# Altium PCB PCB1.PcbDoc
Units mil, origin at the board's own origin, x right, y up, seen from the top; angles counter-clockwise.
Board outline 3503.93 x 3503.94 mil, 2 copper layers (Top Layer, Bottom Layer); 48 components, 34 nets, 226 pads, 50 vias.
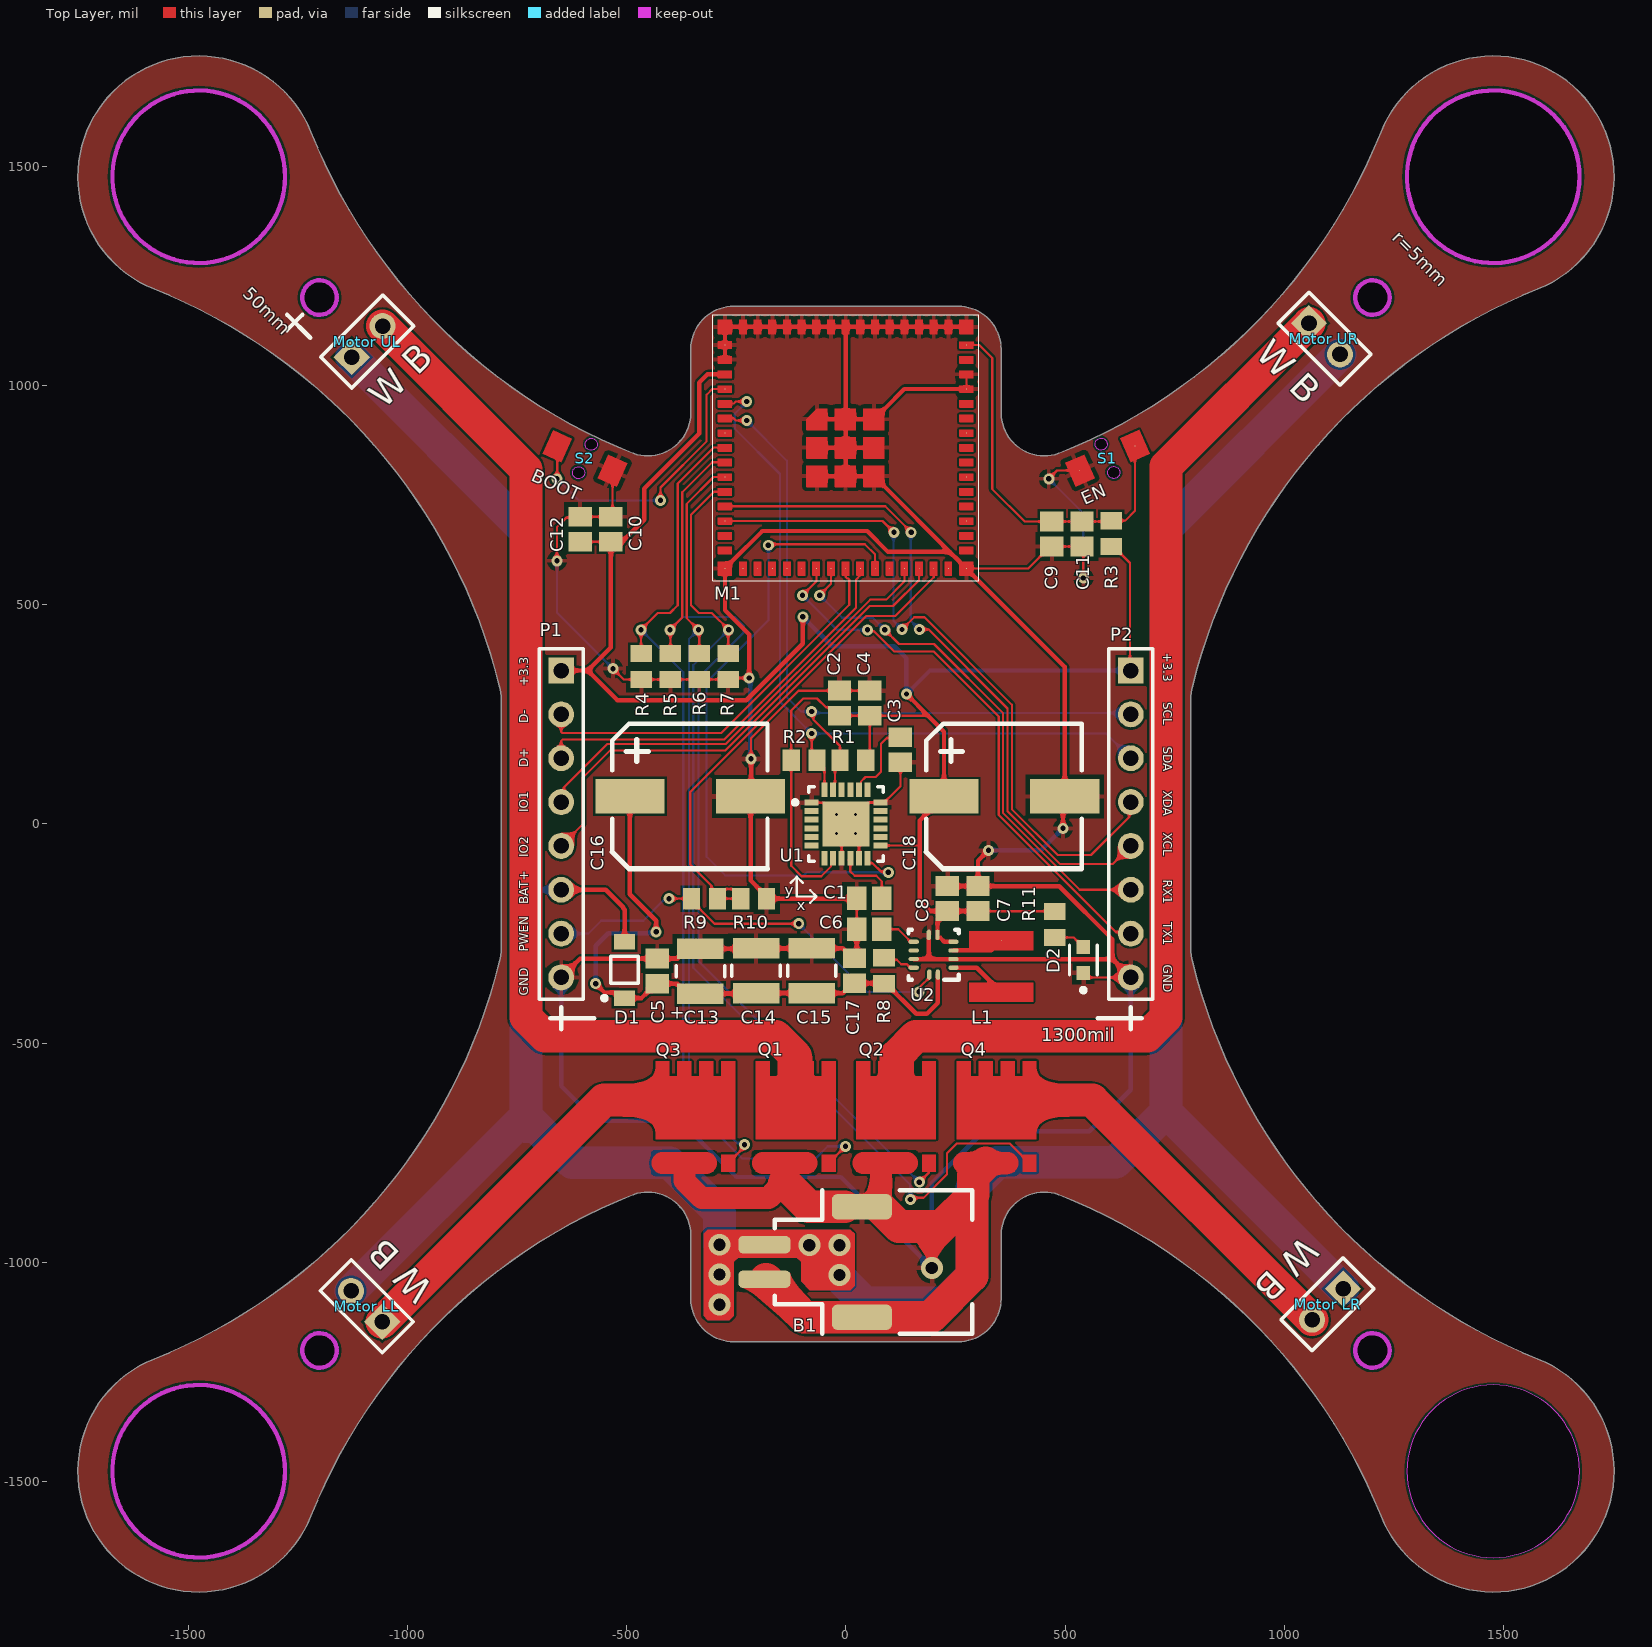
[diagram p0: Top Layer view]
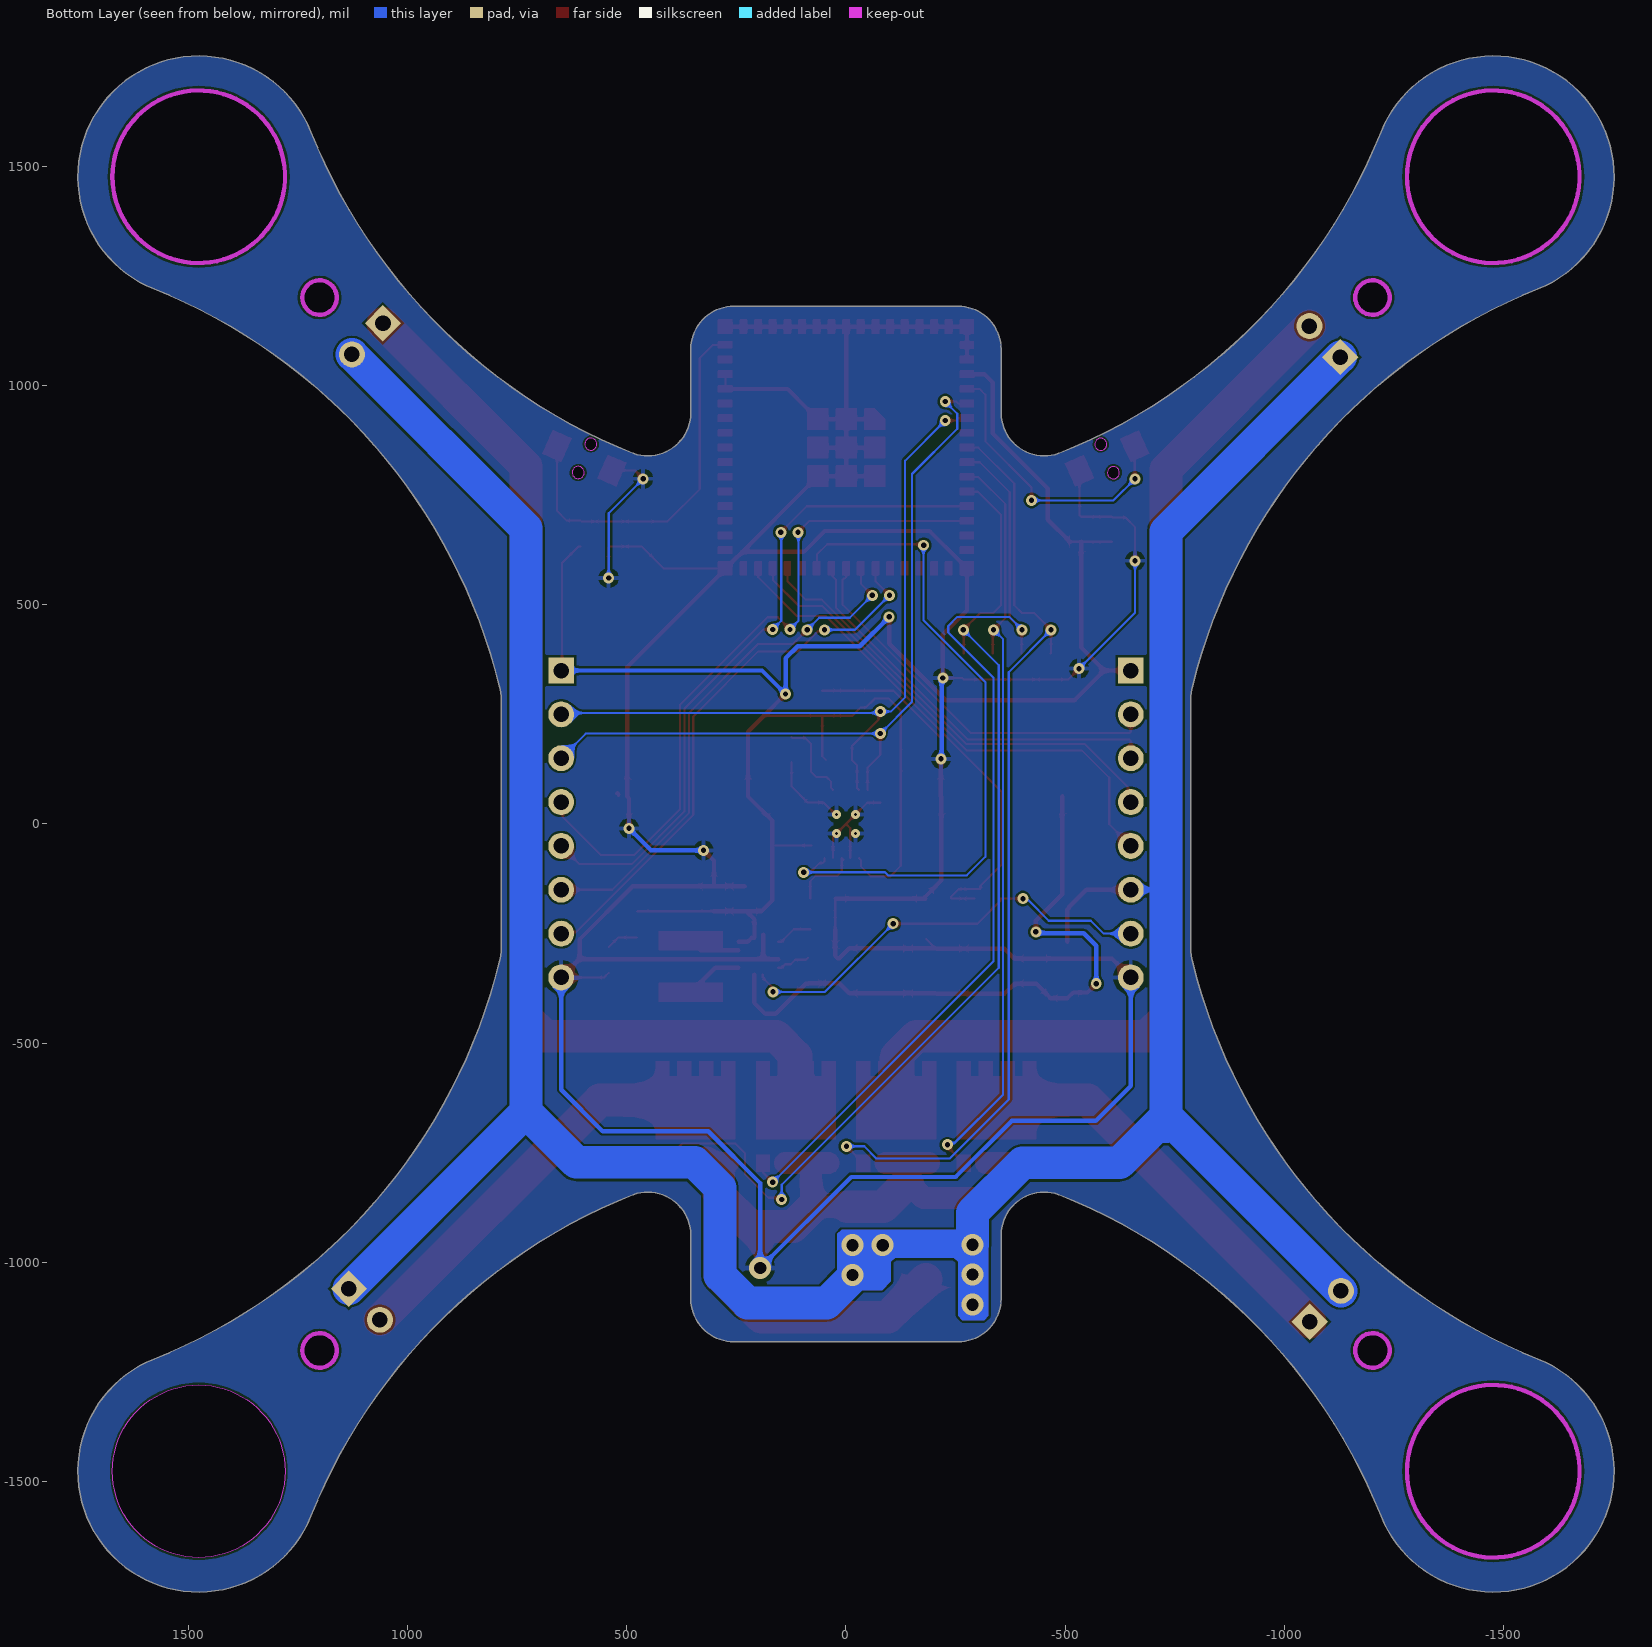
[diagram p1: Bottom Layer view, seen from below]

## Layer stack, top to bottom
Top Solder: solder mask 0.4, Solder Resist, Dk 3.5
Top Layer: signal copper 1.4
Dielectric 1: dielectric 12.6, FR-4, Dk 4.8
Bottom Layer: signal copper 1.4
Bottom Solder: solder mask 0.4, Solder Resist, Dk 3.5

## Board outline
-1220.61,-1579.02 cw(c-1476.38,-1476.38) -1578.53,-1220.42 -1578.93,-1220.58 ccw(c-2066.93,0) -790.67,-314.83 -790.94,-314.74 ccw(c-884.53,-284.26) -786.1,-284.26 -786.1,284.26 ccw(c-884.53,284.26) -790.94,314.74 -790.67,314.83 ccw(c-2066.93,0) -1578.93,1220.58 -1578.53,1220.42 cw(c-1476.38,1476.38) -1220.61,1579.01 ccw(c-0.01,2066.92) -484.95,845.14 -484.92,845.22 ccw(c-452.32,938.09) -353.9,938.09 -353.9,1082.68 cw(c-255.47,1082.68) -255.47,1181.1 255.47,1181.1 cw(c255.47,1082.68) 353.9,1082.68 353.9,938.09 ccw(c452.32,938.09) 484.92,845.22 484.95,845.14 ccw(c0,2066.93) 1220.61,1579.02 cw(c1476.38,1476.38) 1578.53,1220.42 1578.93,1220.58 ccw(c2066.93,0) 790.67,314.83 790.94,314.74 ccw(c884.53,284.26) 786.1,284.26 786.1,-284.26 ccw(c884.53,-284.26) 790.94,-314.74 790.67,-314.83 ccw(c2066.93,0) 1578.93,-1220.58 1578.53,-1220.42 cw(c1476.38,-1476.38) 1220.61,-1579.01 ccw(c0.01,-2066.92) 484.95,-845.14 484.92,-845.22 ccw(c452.32,-938.09) 353.9,-938.09 353.9,-1082.68 cw(c255.47,-1082.68) 255.47,-1181.1 -255.47,-1181.1 cw(c-255.47,-1082.68) -353.9,-1082.68 -353.9,-938.09 ccw(c-452.32,-938.09) -484.92,-845.22 -484.95,-845.14 ccw(c0,-2066.93)
cut-out: -1476.38,1279.53 cw(c-1476.38,1476.38) -1673.23,1476.38 cw(c-1476.38,1476.38) -1476.38,1673.23 cw(c-1476.38,1476.38) -1279.53,1476.38 cw(c-1476.38,1476.38)
cut-out: 1476.38,1279.53 cw(c1476.38,1476.38) 1279.53,1476.38 cw(c1476.38,1476.38) 1476.38,1673.23 cw(c1476.38,1476.38) 1673.23,1476.38 cw(c1476.38,1476.38)
cut-out: 1279.53,-1476.38 ccw(c1476.38,-1476.38) 1476.38,-1673.23 ccw(c1476.38,-1476.38) 1673.23,-1476.38 ccw(c1476.38,-1476.38) 1476.38,-1279.53 ccw(c1476.38,-1476.38)
cut-out: -1476.38,-1673.23 cw(c-1476.38,-1476.38) -1673.23,-1476.38 cw(c-1476.38,-1476.38) -1476.38,-1279.53 cw(c-1476.38,-1476.38) -1279.53,-1476.38 cw(c-1476.38,-1476.38)
cut-out: 1161.42,1200.79 cw(c1200.79,1200.79) 1200.79,1240.16 cw(c1200.79,1200.79) 1240.16,1200.79 cw(c1200.79,1200.79) 1200.79,1161.42 cw(c1200.79,1200.79)
cut-out: 1200.79,-1161.42 cw(c1200.79,-1200.79) 1240.16,-1200.79 cw(c1200.79,-1200.79) 1200.79,-1240.16 cw(c1200.79,-1200.79) 1161.42,-1200.79 cw(c1200.79,-1200.79)
cut-out: -1161.42,-1200.79 cw(c-1200.79,-1200.79) -1200.79,-1240.16 cw(c-1200.79,-1200.79) -1240.16,-1200.79 cw(c-1200.79,-1200.79) -1200.79,-1161.42 cw(c-1200.79,-1200.79)
cut-out: -1200.79,1161.42 cw(c-1200.79,1200.79) -1240.16,1200.79 cw(c-1200.79,1200.79) -1200.79,1240.16 cw(c-1200.79,1200.79) -1161.42,1200.79 cw(c-1200.79,1200.79)

## Design rules (kind name [scope] priority, off if disabled: settings)
Clearance [All] p1: gap=5 ignorepadtopadclearanceinfootprint=FALSE
DiffPairsRouting [InDifferentialPair('USB')] p1: maxlimit=10 minlimit=10 mostfreqgap=10 toplayer_minwidth=5 toplayer_maxwidth=15 toplayer_prefwidth=5 bottomlayer_minwidth=5 bottomlayer_maxwidth=15 bottomlayer_prefwidth=5 maxuncoupledlength=500
MatchedLengths USB [InNetClass('USB')] p1: tolerance=5 checknetsindiffpair=FALSE checkdiffpairvsdiffpair=TRUE checkxsignals=TRUE checkothers=TRUE
MinimumSolderMaskSliver [All] p1: minsoldermaskwidth=0
PolygonConnect [All] p1: connectstyle=Relief reliefconductorwidth=10 reliefentries=4 polygonreliefangle="90 Angle" airgapwidth=10
RoutingVias [All] p1: holewidth=28 width=50 viastyle="Through Hole" minholewidth=28 minwidth=50 maxholewidth=28 maxwidth=50
SilkToSilkClearance [All] p1: silktosilkclearance=5
SilkToSolderMaskClearance [IsPad] p1: minsilkscreentomaskgap=5 clearancetoexposedcopper=TRUE
SolderMaskExpansion [All] p1: expansion=4 istentingtop=FALSE
Width [InNetClass('All Nets')] p1: maxlimit=75 minlimit=5 preferedwidth=5 minimp=50.000000 maximp=50.000000 favimp=50.000000
26 further rules are at their usual default settings.

## Classes and differential pairs
differential pair USB: +USB_P -USB_N

## Components (designator, comment, footprint, x,y, rotation, side; value= is the part's Value field where it differs from the comment)
B1 "3.7V Battery" "51005 SMT 2Pin" -162.4,-1162.4 r90 top locked
C1 "0.1uF" CAPC2013X94X50LL20T25 53.15,-169.29 r180 top
C2 "0.1uF" CAPC2013X94X50LL20T25 -14.76,275.59 r90 top
C3 "2.2nF" CAPC2013X94X50LL20T25 124.02,169.29 r90 top
C4 "10nF" CAPC2013X94X50LL20T25 54.13,275.59 r90 top
C5 "10uF" CAPC2013X94X50LL20T25 -430.52,-335.72 r270 top
C6 "1nF" CAPC2013X94X50LL20T25 53.15,-240.16 r0 top
C7 "10uF" CAPC2013X94X50LL20T25 301.18,-170.28 r270 top
C8 "10uF" CAPC2013X94X50LL20T25 231.3,-170.28 r270 top
C9 "0.1uF" CAPC2013X94X50LL20T25 469.49,661.42 r90 top
C10 "0.1uF" CAPC2013X94X50LL20T25 -536.42,672.24 r270 top
C11 "1uF" CAPC2013X94X50LL20T25 538.39,661.42 r270 top
C12 "22uF" CAPC2013X94X50LL20T25 -606.3,672.24 r270 top
C13 "100uF" FP-C1210C107M9PACTU-MFG -332.1,-335.72 r90 top
C14 "100uF" FP-C1210C107M9PACTU-MFG -205.13,-334.73 r90 top
C15 "100uF" FP-C1210C107M9PACTU-MFG -78.16,-334.73 r90 top
C16 "Cap" SMD-EC8X8X10 -223.11,67.99 r0 top locked value=1000uF
C17 "0.1uF" CAPC2013X94X50LL20T25 19.28,-334.73 r90 top
C18 "Cap" SMD-EC8X8X10 493.43,67.99 r0 top locked value=1000uF
D1 "Schottky Diode" ONSC-SOD-123-2-425-04_V -505.32,-332.77 r90 top locked
D2 "LTST-C191TBKT" FP-LTST-C191TBKT-MFG 541.34,-310.04 r90 top
L1 "Inductor" 4020 275.59,-405.51 r90 top value=1.5uH
M1 "ESP32-S3-MINI-1" PCBComponent_1 32334.79,50060.55 r0 top locked
"Motor LL" "Motor DC" HDR1X2 -1058.23,-1135.67 r135 top
"Motor LR" "Motor DC" HDR1X2 1133.7,-1060.19 r225 top
"Motor UL" "Motor DC" HDR1X2 -1127.8,1065.12 r45 top locked
"Motor UR" "Motor DC" HDR1X2 1056.1,1141.73 r315 top locked
P1 "Header 8" HDR1X8 -649.61,350 r270 top locked
P2 "Header 8" HDR1X8 649.61,350 r270 top locked
Q1 "AON6512" LIBRARYSOURCE=Vault -205.31,-541.34 r0 top locked
Q2 "AON6512" LIBRARYSOURCE=Vault 23.62,-541.34 r0 top locked
Q3 "AON6512" LIBRARYSOURCE=Vault -434.45,-541.34 r0 top locked
Q4 "AON6512" LIBRARYSOURCE=Vault 252.95,-541.34 r0 top locked
R1 "10K" RESC2013X60X40LL20T25_A 15.75,145.67 r0 top
R2 "10K" RESC2013X60X40LL20T25_A -95.47,145.67 r180 top
R3 "10K" RESC2013X60X40LL20T25_A 605.32,662.4 r90 top
R4 "10K" RESC2013X60X40LL20T25_A -466.54,359.25 r90 top
R5 "10K" RESC2013X60X40LL20T25_A -400.59,359.25 r90 top
R6 "10K" RESC2013X60X40LL20T25_A -334.65,359.25 r90 top
R7 "10K" RESC2013X60X40LL20T25_A -268.7,359.25 r90 top
R8 "10K" RESC2013X60X40LL20T25_A 86.61,-334.65 r90 top
R9 "10K" RESC2013X60X40LL20T25_A -322.83,-170.28 r180 top
R10 "10K" RESC2013X60X40LL20T25_A -210.63,-170.28 r180 top
R11 "1K" RESC2013X60X40LL20T25_A 476.38,-229.33 r270 top
S1 "ESP_EN" "Button SMT 3.9*2.9" 647.34,889.12 r24 top locked
S2 "BOOT" "Button SMT 3.9*2.9" -520.67,832.68 r336 top locked
U1 "MPU-6050" IS-QFN-24_V 0,0 r0 top locked
U2 "TPS63051(VQFN)" RMW0012A 199.8,-298.23 r180 top

## Footprints (in the part's own frame and the unit in brackets; to place one, negate y for a bottom-side part, rotate by r counter-clockwise, add the part's x,y. Pads: shape width x height; smd on the part's side, far side on the other; paste and mask are expansions set on the pad)
4020 [mil] "4020 SMT inductor"
  round 1 smd: 1(21.65,-78.74) 2(139.76,-78.74)
  Top Layer region: 118.11,-151.57 161.42,-151.57 161.42,-5.91 118.11,-5.91
  Top Layer region: 0,-151.57 0,-5.91 43.31,-5.91 43.31,-151.57
"51005 SMT 2Pin" [mm]
  rrect50% 1x3 smd: 1(3.15,0.6) 2(5.15,0.6)
  rrect50% 1.5x3.5 smd: 3(0.95,-5.05) 4(7.35,-5.05)
  silkscreen extent 0,-11.45 8.3,0
"Button SMT 3.9*2.9" [mil] "卧式贴片3.9mm*2.9mm"
  round 1 smd: 1(0,-29.53) 2(-137.8,-29.53)
  Top Layer region: -23.62,-59.06 23.62,-59.06 23.62,0 -23.62,0
  Top Layer region: -161.42,-59.06 -161.42,0 -114.17,0 -114.17,-59.06
  Keep-Out Layer board cut-out: -68.9,-78.74 -74.17,-77.69 -78.64,-74.7 -81.63,-70.23 -82.68,-64.96 -82.68,-64.96 -81.63,-59.69 -78.64,-55.22 -74.17,-52.23 -68.9,-51.18 -68.9,-51.18 -63.62,-52.23 -59.15,-55.22 -56.17,-59.69 -55.12,-64.96 -55.12,-64.96 -56.17,-70.23 -59.15,-74.7 -63.62,-77.69 -68.9,-78.74
  Keep-Out Layer board cut-out: -68.9,-7.87 -74.17,-6.82 -78.64,-3.84 -81.63,0.63 -82.68,5.91 -82.68,5.91 -81.63,11.18 -78.64,15.65 -74.17,18.64 -68.9,19.69 -68.9,19.69 -63.62,18.64 -59.15,15.65 -56.17,11.18 -55.12,5.91 -55.12,5.91 -56.17,0.63 -59.15,-3.84 -63.62,-6.82 -68.9,-7.87
CAPC2013X94X50LL20T25 [mm] "Chip Capacitor, 2-Leads, Body 2.01x1.25mm, IPC High Density"
  rect 1.15x1.35 smd: 1(-0.725,0) 2(0.725,0)
  body extent -1.1,-0.72 1.1,0.72, height 0.94
FP-C1210C107M9PACTU-MFG [mm]
  rect 1.2x2.7 smd paste+0 mask+0: 1(-1.3,0) 2(1.3,0)
  silkscreen extent -0.33,-1.4 0.33,1.4, body extent -1.6,-1.25 1.6,1.25, height 2.8
FP-LTST-C191TBKT-MFG [mm]
  rect 0.8x0.8 smd paste+0 mask+0: 1(-0.75,0) 2(0.75,0)
  silkscreen extent -1.87,-0.8 0.85,0.8, body extent -1.25,-0.55 1.25,0.55, height 0.25
HDR1X2 [mm] "Connector; Header; 2 Position"
  rect 1.5x1.5 hole 0.9: 1(0,0)
  round 1.5 hole 0.9: 2(2.54,0)
  silkscreen extent -1.27,-1.27 3.81,1.27
HDR1X8 [mm] "Connector; Header; 8 Position"
  rect 1.5x1.5 hole 0.9: 1(0,0)
  round 1.5 hole 0.9: 2(2.54,0) 3(5.08,0) 4(7.62,0) 5(10.16,0) 6(12.7,0) 7(15.24,0) 8(17.78,0)
  silkscreen extent -1.27,-1.27 19.05,1.27
IS-QFN-24_V [mm] "QFN, 24-Leads, Body 4x4mm, Pitch 0.5mm, Thermal Pad 2.7x2.6mm"
  rect 0.8x0.35 smd: 1(-2,1.25) 2(-2,0.75) 3(-2,0.25) 4(-2,-0.25) 5(-2,-0.75) 6(-2,-1.25) 13(2,-1.25) 14(2,-0.75) 15(2,-0.25) 16(2,0.25) 17(2,0.75) 18(2,1.25)
  rect 0.35x0.85 smd mask+0.102: 7(-1.25,-1.975) 8(-0.75,-1.975) 9(-0.25,-1.975) 10(0.25,-1.975) 11(0.75,-1.975) 12(1.25,-1.975) 19(1.25,1.975) 20(0.75,1.975) 21(0.25,1.975) 22(-0.25,1.975) 23(-0.75,1.975) 24(-1.25,1.975)
  rect 2.7x2.6 smd: 25(0,0)
  silkscreen extent -3.07,-2.15 2.15,2.15, body extent -2,-2 2,2, height 0.95
LIBRARYSOURCE=Vault [mil]
  round 1 smd: 1(15.75,-232.28) 2(65.75,-232.28) 3(115.75,-232.28) 4(165.75,-232.28) 5(90.75,-88.58)
  Top Layer region: 31.5,-33.46 31.5,0 0,0 0,-177.17 181.5,-177.17 181.5,0 150,0 150,-33.46 131.5,-33.46 131.5,0 100,0 100,-33.46 81.5,-33.46 81.5,0 50,0 50,-33.46
  Top Layer region: 50,-251.97 50,-212.6 81.5,-212.6 81.5,-251.97
  Top Layer region: 100,-251.97 100,-212.6 131.5,-212.6 131.5,-251.97
  Top Layer region: 150,-251.97 150,-212.6 181.5,-212.6 181.5,-251.97
  Top Layer region: 0,-251.97 0,-212.6 31.5,-212.6 31.5,-251.97
ONSC-SOD-123-2-425-04_V [mm] "SOD, 2-Leads, Body 2.69x1.6mm"
  rect 0.91x1.22 smd: 1(-1.635,0) 2(1.635,0)
  silkscreen extent -1.76,-0.8 0.78,1.28, body extent -1.35,-0.8 1.35,0.8, height 1.35
PCBComponent_1 [mil]
  round 1 smd: 1(-32610.88,-48967.86) 2(-32610.88,-49001.33) 3(-32610.88,-49034.79) 4(-32610.88,-49068.26) 5(-32610.88,-49101.72) 6(-32610.88,-49135.19) 7(-32610.88,-49168.65) 8(-32610.88,-49202.12) 9(-32610.88,-49235.58) 10(-32610.88,-49269.05) 11(-32610.88,-49302.51) 12(-32610.88,-49335.97) 13(-32610.88,-49369.44) 14(-32610.88,-49402.9) 15(-32610.88,-49436.37) 16(-32569.55,-49477.71) 17(-32536.08,-49477.71) 18(-32502.62,-49477.71) 19(-32469.15,-49477.71) 20(-32435.69,-49477.71) 21(-32402.22,-49477.71) 22(-32368.76,-49477.71) 23(-32335.29,-49477.71) 24(-32301.83,-49477.71) 25(-32268.36,-49477.71) 26(-32234.9,-49477.71) 27(-32201.44,-49477.71) 28(-32167.97,-49477.71) 29(-32134.51,-49477.71) 30(-32101.04,-49477.71) 31(-32059.7,-49436.37) 32(-32059.7,-49402.9) 33(-32059.7,-49369.44) 34(-32059.7,-49335.97) 35(-32059.7,-49302.51) 36(-32059.7,-49269.05) 37(-32059.7,-49235.58) 38(-32059.7,-49202.12) 39(-32059.7,-49168.65) 40(-32059.7,-49135.19) 41(-32059.7,-49101.72) 42(-32059.7,-49068.26) 43(-32059.7,-49034.79) 44(-32059.7,-49001.33) 45(-32059.7,-48967.86) 46(-32101.04,-48926.53) 47(-32134.51,-48926.53) 48(-32167.97,-48926.53) 49(-32201.44,-48926.53) 50(-32234.9,-48926.53) 51(-32268.36,-48926.53) 52(-32301.83,-48926.53) 53(-32335.29,-48926.53) 54(-32368.76,-48926.53) 55(-32402.22,-48926.53) 56(-32435.69,-48926.53) 57(-32469.15,-48926.53) 58(-32502.62,-48926.53) 59(-32536.08,-48926.53) 60(-32569.55,-48926.53) 61(-32400.73,-49267.11) 61(-32400.73,-49202.15) 61(-32400.73,-49137.19) 61(-32335.77,-49267.11) 61(-32335.77,-49202.15) 61(-32335.77,-49137.19) 61(-32270.81,-49267.11) 61(-32270.81,-49202.15) 61(-32270.81,-49137.32) 62(-32610.88,-48926.53) 63(-32610.88,-49477.71) 64(-32059.7,-49477.71) 65(-32059.7,-48926.53)
  Top Layer drawing of 598 lines, arcs and shapes, not listed
  silkscreen extent -32638,-49505 -32032,-48899
RESC2013X60X40LL20T25_A [mm] "Chip Resistor, 2-Leads, Body 2.20x1.35mm, IPC High Density"
  rect 1x1.25 smd: 1(-0.75,0) 2(0.75,0)
  body extent -1.1,-0.67 1.1,0.67, height 0.6
RMW0012A [mm]
  oval 0.6x0.25 smd paste+0 mask+0.051: 1(-1.15,0.75) 2(-1.15,0.25) 3(-1.15,-0.25) 4(-1.15,-0.75) 7(1.15,-0.75) 8(1.15,-0.25) 9(1.15,0.25) 10(1.15,0.75)
  oval 0.25x0.6 smd paste+0 mask+0.051: 5(-0.225,-1.15) 6(0.275,-1.15) 11(0.25,1.15) 12(-0.25,1.15)
  silkscreen extent -1.45,-1.45 1.45,1.45
SMD-EC8X8X10 [mm]
  rect 4x2 smd: 1(-6.858,-0.127) 2(0.142,-0.127)
  silkscreen extent -7.88,-4.32 1.12,4.08, body extent -8.38,-4.28 1.52,4.02, height 10.2

## Part data
B1: library part Battery, "3.7V"
C1 C2 C3 C4 C5 C6 C7 C8 C9 C10 C11 C12 C17: library part CMP-2007-04184-1, Manufacturer="AVX Interconnect / Elco", Part Number=08051C222JAT2A
C13 C14 C15: library part CMP-2000-06018-2, "CAP CER 100UF 6.3V X5R 1210", Case Code (Imperial)=1210, Case Code (Metric)=3225, Dielectric=X5R, Dielectric Material=Ceramic, Max Operating Temperature=85°C, Min Operating Temperature=-55°C, Package Quantity=1, Tolerance=20%, Voltage=6.3V, Capacitance=100uF, Case/Package=1210, Construction=Flat, Contact Plating=Tin, Depth=2.5mm, Dissipation Factor=5%, Height=2.5mm, Lead Free="Lead Free", Length=3.2mm, Mount="Surface Mount", Number of Pins=2, Packaging="Tape and Reel", Radiation Hardening=No, REACH SVHC="No SVHC", RoHS Compliant=Yes, Series=C, Termination=SMD/SMT, Thickness=0.11inch, Voltage Rating=6.3V, Voltage Rating (DC)=6.3V, Width=2.5mm
C16 C18: "Capacitor", LatestRevisionDate=17-Jul-2002, LatestRevisionNote="Re-released for DXP Platform.", PackageDescription="Radial Cap, Thru-Hole; 2 Leads; 0.3 in Pin Spacing", PackageReference=RAD-0.3, Published=8-Jun-2000, Publisher="Altium Limited"
D1: library part CMP-1055-00429-1, "Schottky Barrier Diode, 2-Pin SOD-123, Pb-Free, Tape and Reel", Manufacturer="On Semiconductor", PartNumber=BAT54T1G, ComponentLink1Description="Manufacturer URL", ComponentLink1URL=http://www.onsemi.com/, ComponentLink2Description=Datasheet, ComponentLink2URL=http://www.onsemi.cn/pub_link/Collateral/BAT54T1-D.PDF, ComponentLink3Description="Package Specification", ComponentLink3URL=http://www.onsemi.com/pub_link/Collateral/425-04.PDF, Configuration=Single, DatasheetVersion="Rev. 9", IFSM Max (A)=0.6, Mounting Technology="Surface Mount", PackageDescription="2-Pin SOD, Body 1.6 x 2.69 mm", PackageReference=SOD-123-2-425-04, PackageVersion="Rev. G, 10/2009", Packing="Tape and Reel", RoHS=TRUE, trr Max (ns)=5
D2: library part CMP-22017-000008-1, "LED BLUE CLEAR CHIP SMD", Case Code (Imperial)=0603, Case Code (Metric)=1608, Color=Blue, Forward Current=20mA, Forward Voltage=3.8V, Lens Color=Colorless, Max Operating Temperature=80°C, Max Power Dissipation=75mW, Min Operating Temperature=-20°C, Package Quantity=1, Power Dissipation=76mW, Reverse Voltage=5V, Case/Package=0603, Depth=1.6mm, Dominant Wavelength=475nm, Height=0.55mm, Illumination Color=Blue, Lead Free="Lead Free", Length=0.8mm, Lens Style=Diffused, Lens Transparency=Clear, Luminous Intensity=180mcd, Mount="Surface Mount", Number of Elements=1, Number of LEDs=1, Number of Pins=2, Packaging="Tape and Reel", Radiation Hardening=No, Test Current=20mA, Viewing Angle=130°, Wavelength=468nm, Width=0.8mm
P1 P2: "Header, 8-Pin", LatestRevisionDate=17-Jul-2002, LatestRevisionNote="Re-released for DXP Platform.", Publisher="Altium Limited"
Q1 Q2 Q3 Q4: library part CMP-1091-00211-1, "N-Channel OptiMOS Power-Transistor, 60 V VDS, 100 A ID, -55 to 175 degC, PG-TO262-3-1, Tube, Green", Manufacturer=Infineon, PartNumber=IPI029N06N, ComponentLink1Description="Manufacturer URL", ComponentLink1URL=http://www.infineon.com/, ComponentLink2Description=Datasheet, ComponentLink2URL=http://www.infineon.com/dgdl/IPI029N06N_Rev2.2.pdf?folderId=db3a304313b8b5a60113cee8763b02d7&fileId=db3a30433727a44301372bab38f54926, ComponentLink3Description="Package Specification", ComponentLink3URL=http://www.infineon.com/dgdl/DS_IPX65R420CFD_2_4.pdf?folderId=db3a3043156fd5730115c736bcc70ff2&fileId=db3a30432f91014f012f9c293f1a7399, DatasheetVersion="Rev. 2.2", Green=TRUE, Halogen-free=TRUE, ID (max)="100Â A", IDpuls (max)="400Â A", Mounting Technology="Through Hole", PackageDescription="3-Pin Plastic (Green) Transistor Single Outline Package, 10.03 x 8.98 mm Body, 2.54 mm Pitch", PackageReference=PG-TO262-3-1, PackageVersion="Rev. 03, 05/2006", Packing=Tube, Polarity=N, Ptot (max)="136Â W", QG="56Â nC", RDS (on) (max)="2.9Â mOhm", Rth="1.1Â K/W", RthJA (max)="62 K/W", RthJC (max)="1.1Â K/W", VDS (max)="60Â V", VGS(th) (max)="3.3 V", VGS(th) (min)="2.1Â V"
R1 R2 R3 R4 R5 R6 R7 R8 R9 R10 R11: library part CMP-2001-00582-2, "Metal Film Chip Resistor, High Reliability Type, 0.125 W, +/- 0.1%, -55 to 155 degC, 0805 (2012 Metric), RoHS, Tape and Reel", Case Code - in=0805, Case Code - mm=2012, Manufacturer=Panasonic, Operating Temperature Range=-55Cto+155C, Package / Case=0805(2012metric), Package Description="2-Pin Surface Mount Device, Body 2 x 1.25 mm", Power Rating=125mW(1/8W), Resistance=10kOhms, Temperature Coefficient=25PPM/C, Tolerance=0.1%, Voltage Rating=100V, Brand=Panasonic, Datasheet URL=https://industrial.panasonic.com/cdbs/www-data/pdf/RDM0000/AOA0000C307.pdf, Datasheet Version=02/2016, Factory Pack Quantity=5000, Height=0.5mm, Length=2mm, Manufacturer URL=http://www.panasonic.com/, Mounting Technology=SurfaceMount, Package Reference=0805, Packaging=Reel, Product=ThinFilmResistorsSMD, Product Category=ThinFilmResistors-SMD, RoHS=Details, Series=ERA-6A, Termination Style=SMD/SMT, Type=MetalFilmChipResistors, Width=1.25mm
S1 S2: library part SW-PB, "Switch", LatestRevisionDate=17-Jul-2002, LatestRevisionNote="Re-released for DXP Platform.", PackageDescription="Switch; 2 Leads", PackageReference=SPST-2, Published=24-Mar-1999, Publisher="Altium Limited"
U1: library part CMP-1753-00002-2, "3-Axis Gyroscope, Accelerometer and a Digital Motion Processor(TM) (DMP), 2.375 to 3.46 V, -40 to 85 degC, 24-Pin QFN, RoHS, Tape and Reel", Manufacturer=InvenSense, Standard Package=5,000, Category=Sensors,Transducers, Datasheet URL=http://datasheet.octopart.com/MPU-6050-InvenSense-datasheet-14421344.pdf, Datasheet Version="Rev. 3.3, 05/2012", Dynamic Catalog=MPU-6000™Series, Family=Multifunction, Featured Product=MPU-60506-Axis,IntegratedI²CSolution, Manufacturer URL=http://www.invensense.com/, Online Catalog=MPU-6000™Series, Other Names="1428-1007-2 / MPU6050", Output Type=Digital, Sensor Type=MotionTracking, Unit PriceUSD=Digital
L1: Code_IEC=1005, Code_JEITA=0402, LatestRevisionDate=29-May-2009, LatestRevisionNote="IPC-7351 Footprint Added.", PackageDescription="Chip Inductor", PackageReference=0402-A, Published=8-Jun-2000, Publisher="Altium Limited"

## Via types
v1: diameter 25, hole 12, Top Layer to Bottom Layer, 39 vias
v2: diameter 50, hole 28, Top Layer to Bottom Layer, 7 vias
v3: diameter 19.68, hole 7.87, Top Layer to Bottom Layer, tented both sides, 4 vias

## Nets (pads, with @x,y where several pads share a name; then routed paths per layer and width w, separated by ;. In a path a pad name is that pad's centre, name@x,y a point inside that pad or via, vN(x,y) a via of type N, cw(c..) or ccw(c..) an arc to the next point about the centre after c; other vN are vias at no path point)
+3.3: C2.1 C4.1 C7.2 C8.2 C10.2 C12.2 C18.1 M1.3 P1.1 P2.1 R1.2 R2.2 R3.1 R11.1 U1.8 U1.13 U2.4 U2.5 | length 4763.6
  Top Layer w5: C12.2 C10.2 C10.2@-510.83,643.7 ; U1.8 -33.92,-82.15 -33.92,-96.69 -56.32,-119.09 -101.38,-119.09 -125,-95.47 R2.2 -125,258.86 -97.44,286.42 -65.94,286.42 -45.58,266.05 -33.77,266.05 C2.1 C4.1 ; R1.2 54.13,154.53 C4.1 ; U1.13 165.51,-49.21 168.46,-52.17 ; 187.01,247.05 C4.1 ; C7.2 475.39,-198.82 R11.1 ; R3.1 610.24,632.87 647.64,595.47 647.64,351.97 P2.1
  Top Layer w10: P1.1 -588.98,350 ; C10.2 -536.42,402.56 -588.98,350 ; C10.2@-510.83,643.7 -460.4,694.12 -460.4,764.99 -334.65,890.75 -334.65,1006.89 -315.78,1025.76 -291.85,1025.76 ; v1(-98.43,472.44) -98.43,411.42 -227.36,282.48 -521.46,282.48 -588.98,350 ; v1(137.8,296.26) 187.01,247.05 223.43,210.63 C18.1 168.46,8.03 168.46,-52.17 168.46,-174.37 192.91,-198.82 C8.2@227.36,-198.82 ; U2.4 245,-268.62 224.33,-268.62 215.47,-259.76 208.74,-259.76 208.66,-259.69 U2.5 208.66,-217.52 C8.2@227.36,-198.82 ; C7.2 C8.2 C8.2@227.36,-198.82
  Bottom Layer w10: v1(-98.43,472.44) -31.5,405.51 110.24,405.51 137.8,377.95 v1(137.8,296.26) 191.54,350 P2.1
ADC: M1.29 R9.1 R10.2 | length 1151.9
  Top Layer w5: R9.1 R10.2 -240.16,-165.35 -257.34,-148.17 -306.74,-148.17 -306.74,-141.1 -355.31,-92.52 -355.31,73.21 45.88,474.41 112.2,474.41 200.28,562.48 200.28,567.1 M1.29
BAT+: "Motor LL.2" "Motor LR.1" "Motor UL.1" "Motor UR.2" B1.2 D1.2 P1.6 | length 6964.5
  Top Layer w10: P1.6 -547.83,-150 -508.11,-189.72 -508.11,-192.24 -504.92,-195.43 -504.92,-267.99 D1.2
  Bottom Layer w10: -730.23,-151.57 -728.65,-150 P1.6
  Bottom Layer w75: -1128.94,-1064.96 -742.13,-678.15 ; -1127.8,1065.12 -730.23,667.55 -730.23,-151.57 -730.23,-666.43 ; -730.23,-690.05 -730.23,-666.43 ; v2(-288.39,-959.65) -288.39,-886.81 -402.56,-772.64 -624.02,-772.64 -730.23,-666.43 ; -43.31,-1004.92 44.29,-1092.52 224.41,-1092.52 287.4,-1029.53 287.4,-829.72 345.47,-771.65 615.08,-771.65 730.32,-656.41 ; 1126.81,1071.02 730.32,674.52 730.32,-660.43 733.94,-660.43 1133.7,-1060.19
  other v2: -288.39,-1096.46 -14.76,-1028.54 -288.39,-1027.56 -83.66,-960.63 -14.76,-960.63
ESP_EN: C9.2 C11.1 M1.45 R3.2 S1.1 | length 884.2
  Top Layer w5: M1.45 290.83,1092.69 303.97,1092.69 333.66,1062.99 333.66,763.78 407.48,689.96 C11.1 603.35,689.96 R3.2 636.81,691.93 659.35,714.46 S1.1
GND: B1.1 B1.3 B1.4 C1.2 C2.2 C3.1 C4.2 C5.1 C6.1 C7.1 C8.1 C9.1 C10.1 C11.2 C12.1 C13.2 C14.2 C15.2 C16.2 C17.2 C18.2 D2.1 M1.1 M1.2 M1.42 M1.43 M1.46 M1.47 M1.48 M1.49 M1.50 M1.51 M1.52 M1.53 M1.54 M1.55 M1.56 M1.57 M1.58 M1.59 M1.60 M1.61 M1.62 M1.63 M1.64 M1.65 P1.8 P2.8 Q1.1 Q1.2 Q1.3 Q2.1 Q2.2 Q2.3 Q3.1 Q3.2 Q3.3 Q4.1 Q4.2 Q4.3 R4.1 R5.1 R6.1 R7.1 R10.1 S1.2 S2.1 U1.1 U1.9 U1.11 U1.18 U1.25 U2.2 U2.6 U2.9 | length 12732.3
  Top Layer w5: v1(-659.45,600.39) -659.45,677.17 -637.44,699.17 -607.92,699.17 C12.1 C10.1 -532.68,704.53 S2.1 ; v1(-531.5,354.33) -506.89,329.72 R4.1 R5.1 R6.1 R7.1 -265.42,333 v1(-220.8,333) ; v1(-216.54,148.62) -216.54,195.87 -108.27,304.13 C2.2 C4.2 ; C14.2 -204.19,-283.55 C14.2@-183.07,-262.43 ; R10.1 R10.1@-181.1,-165.35 ; U1.1 -78.21,48.68 -48.68,48.68 v3(-21.65,21.65) U1.25 ; U1.9 -9.84,-9.84 U1.25 ; v3(21.65,21.65) 23.62,21.65 51.18,49.21 U1.18 87.6,49.21 124.02,85.63 C3.1 ; C1.2@23.62,-170.28 C1.2 C6.1 ; U1.11 29.53,-29.53 v3(21.65,-21.65) U1.25 ; M1.42 275.08,1000.17 275.08,1017.88 M1.43 ; 290.83,582.84 415.52,582.84 465.55,632.87 C9.1 C11.2 541.34,629.92 v1(541.34,561.02) ; v1(462.6,787.4) 481.3,806.1 S1.2 ; D2.1 551.77,-350 P2.8
  Top Layer w10: P1.8 -606.78,-307.18 C5.1 -384.26,-307.18 -361.62,-284.54 C13.2 -206.11,-284.54 C14.2 ; M1.63 -276.1,567.1 -276.1,487.6 -220.8,432.3 v1(-220.8,333) ; -276.1,1067.1 -276.1,1084.81 ; -276.1,1100.56 -276.1,1118.28 ; -260.35,598.59 -190.64,668.31 48.23,668.31 95.95,620.59 236.83,620.59 ; -260.35,1134.03 -242.63,1134.03 M1.60 ; -226.89,1134.03 -209.17,1134.03 M1.59 ; v1(-216.54,148.62) -216.54,63.98 C16.2 -217.52,-128.94 R10.1@-181.1,-165.35 ; C14.2@-204.19,-283.55 C15.2 -7.29,-283.55 15.35,-306.19 C17.2 24.61,-300.87 C6.1 ; -193.42,1134.03 -175.7,1134.03 M1.58 ; R10.1 C1.2@23.62,-170.28 ; -159.96,1134.03 -142.24,1134.03 M1.57 ; -126.49,1134.03 -108.78,1134.03 M1.56 ; -93.03,1134.03 -75.31,1134.03 M1.55 ; -59.56,1134.03 -41.85,1134.03 M1.54 ; -42.33,793.44 -24.6,793.44 ; -42.33,858.4 -24.6,858.4 ; -42.32,923.36 -24.6,923.36 ; -26.1,1134.03 -8.38,1134.03 ; -0.98,817.06 -0.98,834.78 ; -0.98,882.02 -0.98,899.74 ; M1.61@-0.98,923.36 -0.98,946.98 -0.98,1118.28 -0.98,1133.55 M1.53 ; 7.37,1134.03 25.08,1134.03 ; 22.63,793.44 40.36,793.44 ; 22.63,858.4 40.36,858.4 ; 22.63,923.36 40.36,923.36 ; M1.52 40.83,1134.03 58.55,1134.03 ; M1.51 74.3,1134.03 92.01,1134.03 ; 87.59,769.82 236.83,620.59 ; 87.59,946.85 133.04,992.29 259.33,992.29 ; M1.50 107.76,1134.03 125.48,1134.03 ; M1.49 141.22,1134.03 158.94,1134.03 ; U2.9 188.98,-308.07 ; M1.48 174.69,1134.03 192.41,1134.03 ; v2@185.83,-1012.8 v2(195.87,-1012.8) ; U2.6 188.98,-308.07 ; v2@192.13,-1012.8 v2(195.87,-1012.8) ; 195.87,-939.96 v2(195.87,-1012.8) ; M1.47 208.15,1134.03 225.87,1134.03 ; C8.1 C7.1 ; M1.46 241.62,1134.03 259.33,1134.03 ; 259.33,598.08 236.83,620.59 ; 290.32,567.1 499.02,358.4 C18.2 495.08,59.06 v1(495.08,-9.84) ; v1(324.8,-60.04) 301.18,-83.66 C7.1 ; C18.2@519.02,67.01 C18.2@521.97,69.96 ; P2.8 607.68,-308.07 ; 188.98,-308.07 U2.2 607.68,-308.07 ; C7.1 486.22,-141.73 607.68,-263.19 607.68,-308.07
  Top Layer w50: Q3.1 Q3.2 ; Q3.3 Q3.2 ; Q1.1 Q1.3 ; Q1.2 -139.57,-816.73 -176.18,-853.35 -328.74,-853.35 -368.7,-813.39 Q3.2 ; B1.4@-2.95,-873.03 B1.4 75.79,-873.03 80.32,-868.5 80.32,-782.68 ; Q2.1 Q2.3 ; Q4.1 Q4.2 Q4.3
  Top Layer w75: B1.1@-182.28,-1038.39 -95.67,-1125 192.91,-1125 287.35,-1030.57 287.35,-848.48 ; -139.57,-816.73 -139.57,-818.11 -84.65,-873.03 B1.4@-2.95,-873.03 ; B1.4@75.79,-873.03 121.06,-918.31 217.52,-918.31 ; 195.87,-939.96 217.52,-918.31 ; Q4.2 290.35,-801.97 290.35,-845.47 287.35,-848.48 ; 217.52,-918.31 287.35,-848.48
  Bottom Layer w5: v1@-657.48,602.36 v1(-659.45,600.39) -659.45,482.28 v1(-531.5,354.33) ; v1(462.6,787.4) 541.34,708.66 v1(541.34,561.02)
  Bottom Layer w10: P1.8 -649.61,-597.44 -569.88,-677.17 -377.95,-677.17 -250,-805.12 -11.81,-805.12 v2(195.87,-1012.8) 195.87,-818.9 313.98,-700.79 555.12,-700.79 649.61,-606.3 P2.8 ; v1(-220.8,333) -218.01,330.22 -218.01,150.1 v1(-216.54,148.62) ; v1(324.8,-60.04) 444.88,-60.04 v1(495.08,-9.84)
  other v3: -21.65,-21.65
GPIO0: M1.4 S2.2 | length 663.3
  Top Layer w5: v1(-659.45,787.4) -658.56,788.29 S2.2 ; v1(-423.23,738.19) -423.23,767.72 -317.91,873.03 -317.91,979.33 -305.12,992.13 -291.85,992.13 -276.27,992.13 M1.4
  Bottom Layer w5: v1(-659.45,787.4) -610.24,738.19 v1(-423.23,738.19)
IO1: M1.27 P1.4 | length 1037
  Top Layer w5: P1.4 -643.26,56.34 -643.26,84.1 -544.86,182.5 -274.31,182.5 55,511.81 91.54,511.81 133.35,553.63 133.35,567.1 M1.27
IO2: M1.28 P1.5 | length 1156.1
  Top Layer w5: P1.5 -600.39,-0.79 -600.39,105.31 -537.76,167.94 -274.72,167.94 54.38,497.05 107.28,497.05 166.82,556.58 166.82,567.1 M1.28
MPU_INT: M1.25 U1.12 | length 1555.2
  Top Layer w5: v1(-177.17,635.83) -174.69,638.3 42.8,638.3 66.42,614.68 66.42,598.59 M1.25 ; U1.12 49.21,-84.83 53.6,-89.22 60.67,-89.22 79.93,-108.48 94.7,-108.48 v1(96.46,-110.24)
  Bottom Layer w5: v1(-177.17,635.83) -176.66,635.32 -176.66,465.07 -317.91,323.82 -317.91,-74.8 -275.59,-117.13 -95.72,-117.13 -88.83,-110.24 v1(96.46,-110.24)
NetC1_1: C1.1 U1.10 | length 156.3
  Top Layer w5: U1.10@5.45,-82.15 U1.10 9.84,-108.27 19.69,-118.11 68.9,-118.11 81.69,-130.91 C1.1
NetC3_2: C3.2 U1.20 | length 190.2
  Top Layer w5: U1.20 33.92,82.15 33.92,96.69 44.51,107.28 67.91,107.28 79.72,119.09 79.72,183.07 92.87,196.22 122.4,196.22 C3.2
NetC6_2: C6.2 U2.7 | length 84.7
  Top Layer w5: C6.2 119.09,-240.16 147.64,-268.7 U2.7
NetD2_2: D2.2 R11.2 | length 73.9
  Top Layer w5: R11.2 519.69,-258.86 D2.2
NetL1_1: L1.1 U2.1 | length 132.5
  Top Layer w10: U2.1 298.23,-327.76 L1.1
NetL1_2: L1.2 U2.3 | length 118.6
  Top Layer w10: U2.3 331.69,-288.39 L1.2
"NetMotor LL_1": "Motor LL.1" Q3.5 | length 924
  Top Layer w75: -1058.23,-1135.67 -552.48,-629.92 Q3.5
"NetMotor LR_2": "Motor LR.2" Q4.5 | length 926.8
  Top Layer w75: Q4.5 562.01,-629.92 1062.99,-1130.91
"NetMotor UL_2": "Motor UL.2" Q1.5 | length 2464.2
  Top Layer w75: -1057.09,1135.83 -730.31,809.06 -730.31,-440.32 -686.38,-484.25 -160.43,-484.25 -114.57,-530.12 Q1.5
"NetMotor UR_1": "Motor UR.1" Q2.5 | length 2470.4
  Top Layer w75: Q2.5 114.37,-529.33 159.45,-484.25 686.38,-484.25 730.32,-440.32 730.32,815.94 1056.1,1141.73
NetR8_2: R8.2 U2.10 | length 77.3
  Top Layer w5: R8.2 91.19,-309.69 115.79,-309.69 125.98,-319.88 138.78,-319.88 146.65,-327.76 U2.10
PW_EN: P1.7 R9.2 U2.11 | length 991.9
  Top Layer w5: v1(-403.54,-170.28) R9.2 -352.36,-175.2 -300.11,-227.45 v1(-107.73,-227.45) ; v1(166.34,-382.87) 170.17,-379.05 170.17,-370.19 189.96,-350.39 U2.11
  Bottom Layer w5: P1.7 -587.6,-250 -558.07,-220.47 -462.6,-220.47 -416.23,-174.1 -407.37,-174.1 v1(-403.54,-170.28) ; v1(-107.73,-227.45) 47.69,-382.87 v1(166.34,-382.87) v1@164.37,-384.84
PWM_LL: M1.10 Q3.4 R6.2 | length 1762.3
  Top Layer w5: v1@-343.15,444.89 -343.15,449.45 -363.35,469.65 -363.35,730.16 -302,791.51 -291.85,791.51 M1.10 ; v1(-336.61,442.91) -334.65,440.94 R6.2 ; Q3.4 -231.3,-736.22 v1(-231.3,-731.49)
  Bottom Layer w5: v1(-336.61,442.91) -358.43,421.1 -358.43,-616.96 -247.73,-727.66 -235.13,-727.66 v1(-231.3,-731.49)
PWM_LR: M1.11 Q4.4 R7.2 | length 2379.1
  Top Layer w5: M1.11 -291.85,758.04 -301.01,758.04 -353.35,705.71 -353.35,499.02 -335.63,481.3 -306.1,481.3 v1(-267.72,442.91) ; R7.2 v1@-268.7,443.9 ; v1(146.65,-856.3) 150.48,-852.47 177.06,-852.47 230.32,-799.21 230.32,-750.98 252.68,-728.62 373.7,-728.62 Q4.4
  Bottom Layer w5: v1(-267.72,442.91) -348.43,362.2 -348.43,-327.76 146.65,-822.83 v1(146.65,-856.3)
PWM_UL: M1.8 Q1.4 R4.2 | length 2183.5
  Top Layer w5: R4.2 -467.52,389.76 v1(-467.52,442.91) -429.13,481.3 -401.57,481.3 -383.86,499.02 -383.86,776.57 -302,858.44 -291.85,858.44 M1.8 ; Q1.4 -39.37,-773.62 v1(-0.98,-735.24)
  Bottom Layer w5: v1(-467.52,442.91) -371.06,346.46 -371.06,-628.33 -236.59,-762.8 -69.19,-762.8 -41.63,-735.24 v1(-0.98,-735.24)
PWM_UR: M1.9 Q2.4 R5.2 | length 2266.4
  Top Layer w5: R5.2 -400.59,443.9 -373.35,471.14 -373.35,756.57 -304.95,824.97 -291.85,824.97 M1.9 ; v1(167.32,-816.93) 189.37,-794.88 Q2.4
  Bottom Layer w5: v1(-401.57,442.91) -372.05,472.44 -253.94,472.44 -233.27,451.77 -233.27,437.01 -336.61,333.66 -336.61,-312.99 v1(167.32,-816.93)
RXD1: M1.22 P2.6 | length 1193.4
  Top Layer w5: v1(-60.04,521.65) -33.97,547.72 -33.97,567.1 M1.22 ; v1(88.58,442.91) 121.06,410.43 200.79,410.43 358.43,252.8 358.43,24.81 533.24,-150 P2.6
  Bottom Layer w5: v1(-60.04,521.65) -8.86,470.47 61.02,470.47 v1(88.58,442.91)
RXD2: M1.13 P2.4 | length 1591.1
  Top Layer w5: M1.13 -260.35,691.11 83.49,691.11 v1(109.25,665.35) ; v1(127.95,443.9) 155.51,471.46 179.13,471.46 378.43,272.17 378.43,33.98 483.27,-70.87 559.06,-70.87 645.82,15.9 645.82,46.22 P2.4
  Bottom Layer w5: v1(109.25,665.35) 108.27,664.37 108.27,463.58 v1(127.95,443.9)
SCL: M1.6 P2.2 R1.1 U1.23 | length 1733.3
  Top Layer w5: M1.6 -260.35,925.36 -256.49,925.36 -251.4,920.28 v1(-226.38,920.28) ; v1(-78.23,256.38) -74.41,252.56 -74.41,238.4 -13.78,177.78 R1.1 -25.25,134.2 -25.25,82.04 U1.23
  Bottom Layer w5: v1(-226.38,920.28) -134.84,828.74 -134.84,289.37 -101.85,256.38 v1(-78.23,256.38) -75.04,253.19 646.42,253.19 P2.2
SDA: M1.5 P2.3 R2.1 U1.24 | length 1784.8
  Top Layer w5: M1.5 -260.35,958.83 -256.32,958.83 -251.57,963.58 v1(-226.38,963.58) ; v1(-78.23,206.19) -78.23,157.52 -49.21,128.5 U1.24
  Bottom Layer w5: v1(-226.38,963.58) -253.94,936.02 -253.94,901.57 -150.59,798.23 -150.59,278.54 v1(-78.23,206.19) 593.42,206.19 P2.3
SYS_IN+: C5.2 C13.1 C14.1 C15.1 C16.1 C17.1 D1.1 R8.1 U2.12 | length 1502.7
  Top Layer w10: v1(-570.87,-364.17) -550.82,-384.22 -518.24,-384.22 D1.1 -466.31,-397.14 -452.09,-382.92 -452.09,-381.9 -434.46,-364.26 C5.2 -384.26,-364.26 -361.62,-386.9 C13.1 -206.11,-386.9 C14.1 C15.1 -7.29,-385.92 15.35,-363.28 C17.1 85.72,-363.28 R8.1 91.54,-364.17 160.43,-433.07 184.55,-433.07 209.65,-407.97 U2.12 ; C16.1 -493.11,-160.43 -433.07,-220.47 v1(-433.07,-246.06)
  Bottom Layer w10: v1(-570.87,-364.17) -570.87,-277.56 -542.24,-248.93 -435.94,-248.93 v1(-433.07,-246.06)
TXD1: M1.21 P2.7 | length 1274.5
  Top Layer w5: v1(-99.41,521.65) -67.44,553.63 -67.44,567.1 M1.21 ; v1(49.21,442.91) 52.81,439.31 63.9,439.31 109.51,393.7 199.8,393.7 348.43,245.08 348.43,20.67 615.51,-246.41 646.02,-246.41 P2.7
  Bottom Layer w5: v1(-99.41,521.65) -20.67,442.91 v1(49.21,442.91)
TXD2: M1.12 P2.5 | length 1537.9
  Top Layer w5: M1.12 -260.35,724.58 89.4,724.58 v1(148.62,665.35) ; v1(167.32,443.9) 187.99,443.9 368.43,263.46 368.43,28.95 488.91,-91.54 608.07,-91.54 P2.5
  Bottom Layer w5: v1(148.62,665.35) 147.64,664.37 147.64,463.58 v1(167.32,443.9)
USB_N: M1.23 P1.2 | length 906.6
  Top Layer w5: P1.2 -649.61,210.43 -646.68,207.5 -284.66,207.5 7.64,499.8 7.64,557.18 4.71,560.11 2.93,560.11 -0.51,563.55 -0.51,567.1 M1.23
USB_P: M1.24 P1.3 | length 931.3
  Top Layer w5: P1.3 -649.61,189.57 -646.68,192.5 -278.45,192.5 22.64,493.59 22.64,556.87 32.86,567.1 32.96,567.19 M1.24
pads on no net: M1.7 M1.14 M1.15 M1.16 M1.17 M1.18 M1.19 M1.20 M1.26 M1.30 M1.31 M1.32 M1.33 M1.34 M1.35 M1.36 M1.37 M1.38 M1.39 M1.40 M1.41 M1.44 U1.2 U1.3 U1.4 U1.5 U1.6 U1.7 U1.14 U1.15 U1.16 U1.17 U1.19 U1.21 U1.22 U2.8

## Polygon pours and split planes (outlines as drawn)
GND on Top Layer "GND_L01_P002" (solid, remove dead copper, pour order 2): -1220.61,-1579.02 cw(c-1476.38,-1476.38) -1578.53,-1220.42 -1578.93,-1220.58 ccw(c-2066.93,0) -790.67,-314.83 -790.94,-314.74 ccw(c-884.53,-284.26) -786.1,-284.26 -786.1,284.26 ccw(c-884.53,284.26) -790.94,314.74 -790.67,314.83 ccw(c-2066.93,0) -1578.93,1220.58 -1578.53,1220.42 cw(c-1476.38,1476.38) -1220.61,1579.01 ccw(c-0.01,2066.92) -484.95,845.14 -484.92,845.22 ccw(c-452.32,938.09) -353.9,938.09 -353.9,1082.68 cw(c-255.47,1082.68) -255.47,1181.1 255.47,1181.1 cw(c255.47,1082.68) 353.9,1082.68 353.9,938.09 ccw(c452.32,938.09) 484.92,845.22 484.95,845.14 ccw(c0,2066.93) 1220.61,1579.02 cw(c1476.38,1476.38) 1578.53,1220.42 1578.93,1220.58 ccw(c2066.93,0) 790.67,314.83 790.94,314.74 ccw(c884.53,284.26) 786.1,284.26 786.1,-284.26 ccw(c884.53,-284.26) 790.94,-314.74 790.67,-314.83 ccw(c2066.93,0) 1578.93,-1220.58 1578.53,-1220.42 cw(c1476.38,-1476.38) 1220.61,-1579.01 ccw(c0.01,-2066.92) 484.95,-845.14 484.92,-845.22 ccw(c452.32,-938.09) 353.9,-938.09 353.9,-1082.68 cw(c255.47,-1082.68) 255.47,-1181.1 -255.47,-1181.1 cw(c-255.47,-1082.68) -353.9,-1082.68 -353.9,-938.09 ccw(c-452.32,-938.09) -484.92,-845.22 -484.95,-845.14 ccw(c0,-2066.93)
GND on Bottom Layer "GND_L02_P003" (solid, remove dead copper, pour order 3): -1220.61,-1579.02 cw(c-1476.38,-1476.38) -1578.53,-1220.42 -1578.93,-1220.58 ccw(c-2066.93,0) -790.67,-314.83 -790.94,-314.74 ccw(c-884.53,-284.26) -786.1,-284.26 -786.1,284.26 ccw(c-884.53,284.26) -790.94,314.74 -790.67,314.83 ccw(c-2066.93,0) -1578.93,1220.58 -1578.53,1220.42 cw(c-1476.38,1476.38) -1220.61,1579.01 ccw(c-0.01,2066.92) -484.95,845.14 -484.92,845.22 ccw(c-452.32,938.09) -353.9,938.09 -353.9,1082.68 cw(c-255.47,1082.68) -255.47,1181.1 255.47,1181.1 cw(c255.47,1082.68) 353.9,1082.68 353.9,938.09 ccw(c452.32,938.09) 484.92,845.22 484.95,845.14 ccw(c0,2066.93) 1220.61,1579.02 cw(c1476.38,1476.38) 1578.53,1220.42 1578.93,1220.58 ccw(c2066.93,0) 790.67,314.83 790.94,314.74 ccw(c884.53,284.26) 786.1,284.26 786.1,-284.26 ccw(c884.53,-284.26) 790.94,-314.74 790.67,-314.83 ccw(c2066.93,0) 1578.93,-1220.58 1578.53,-1220.42 cw(c1476.38,-1476.38) 1220.61,-1579.01 ccw(c0.01,-2066.92) 484.95,-845.14 484.92,-845.22 ccw(c452.32,-938.09) 353.9,-938.09 353.9,-1082.68 cw(c255.47,-1082.68) 255.47,-1181.1 -255.47,-1181.1 cw(c-255.47,-1082.68) -353.9,-1082.68 -353.9,-938.09 ccw(c-452.32,-938.09) -484.92,-845.22 -484.95,-845.14 ccw(c0,-2066.93)

## Keep-outs
Keep-Out Layer:
  circle w10: c1476.38,1476.38 r196.85
  circle w10: c1200.79,1200.79 r39.37
  circle w10: c1200.79,-1200.79 r39.37
  circle w10: c-1476.38,-1476.38 r196.85
  circle w10: c-1200.79,-1200.79 r39.37
  circle w10: c-1200.79,1200.79 r39.37
  circle w10: c-1476.38,1476.38 r196.85

## Other copper
Top Layer:
  region net BAT+: 9.84,-925.2 19.69,-935.04 19.69,-1053.15 9.84,-1062.99 -82.68,-1062.99 -102.36,-1043.31 -102.36,-999.02 -112.2,-989.17 -246.06,-989.17 -255.91,-999.02 -255.91,-1122.05 -265.75,-1131.89 -314.96,-1131.89 -324.8,-1122.05 -324.8,-935.04 -314.96,-925.2
Bottom Layer:
  region net BAT+: 9.84,-925.2 19.69,-935.04 19.69,-1053.15 9.84,-1062.99 -82.68,-1062.99 -102.36,-1043.31 -102.36,-999.02 -112.2,-989.17 -246.06,-989.17 -255.91,-999.02 -255.91,-1122.05 -265.75,-1131.89 -314.96,-1131.89 -324.8,-1122.05 -324.8,-935.04 -314.96,-925.2

## Silkscreen, mask and mechanical layers (free items; w line width, h text height)
Top Overlay:
  lines w5: -126.37,-134.58 -112.23,-120.43 ; -98.06,-134.5 -112.2,-120.35 -112.2,-165.35 -67.2,-165.35 ; -81.35,-179.5 -67.2,-165.35 ; -81.35,-151.21 -67.2,-165.35
  lines w10: -1275.03,1126.54 -1239.68,1161.9 ; -1275.03,1161.9 -1222,1108.86 ; -674.61,-443 -574.61,-443 ; -649.61,-468 -649.61,-418 ; 574.61,-443 674.61,-443 ; 649.61,-468 649.61,-418
  text "r=5mm" at 1244.28,1334.65 h30 r315
  text "50mm" at -1378.76,1206.69 h30 r315
  text "W B" at 931.46,1068.9 h60 r315
  text "W B" at -1053.15,945.24 h60 r45
  text "BOOT" at -719.78,784.03 h30 r336
  text "EN" at 544.86,727.07 h30 r24
  text "+3.3" at 724.1,390.08 h20 r270
  text "+3.3" at -725.11,314.45 h20 r90
  text "SCL" at 724.1,277.87 h20 r270
  text "D-" at -725.11,229.8 h20 r90
  text "SDA" at 724.1,176.5 h20 r270
  text "D+" at -725.11,129.41 h20 r90
  text "XDA" at 724.1,76.1 h20 r270
  text "IO1" at -725.11,27.05 h20 r90
  text "XCL" at 724.1,-20.35 h20 r270
  text "IO2" at -725.11,-76.3 h20 r90
  text "RX1" at 724.1,-126.65 h20 r270
  text "y" at -139.68,-162.85 h25
  text "BAT+" at -725.11,-183.58 h20 r90
  text "x" at -112.13,-196.77 h25
  text "TX1" at 724.1,-224.09 h20 r270
  text "PWEN" at -725.11,-290.87 h20 r90
  text "GND" at 724.1,-320.55 h20 r270
  text "GND" at -725.11,-391.26 h20 r90
  text "+" at -402.48,-443.9 h30
  text "1300mil" at 445.94,-495 h30
  text "W B" at 1042.32,-938.35 h60 r225
  text "W B" at -938.35,-1057.09 h60 r135
Mechanical 1:
  circle w10: c610.24,801.18 r14.64
  circle w10: c581.69,866.14 r14.28
  circle w10: c-580.71,866.14 r14.14
  circle w10: c-610.24,801.18 r14.32
  circle w10: c-1476.38,1476.38 r196.85
  circle w10: c-1200.79,1200.79 r39.37
  circle w10: c-1200.79,-1200.79 r39.37
  circle w10: c-1476.38,-1476.38 r196.85
  circle w10: c1200.79,-1200.79 r39.37
  circle w10: c1476.38,-1476.38 r196.85
  circle w10: c1200.79,1200.79 r39.37
  circle w10: c1476.38,1476.38 r196.85
  lines w10: -1578.93,-1220.58 ccw(c-2066.93,0) -790.67,-314.83 ; -1578.93,1220.58 cw(c-2066.93,0) -790.67,314.83 ; -1578.53,-1220.42 ccw(c-1476.38,-1476.38) -1220.61,-1579.01 cw(c0,-2066.93) -484.95,-845.14 ; -1578.53,1220.42 cw(c-1476.38,1476.38) -1220.61,1579.01 ccw(c0,2066.93) -484.95,845.14 ; -790.94,-314.74 ccw(c-884.53,-284.26) -786.1,-284.26 -786.1,284.26 ccw(c-884.53,284.26) -790.94,314.74 ; -484.92,-845.22 cw(c-452.32,-938.09) -353.9,-938.09 -353.9,-1082.68 ccw(c-255.47,-1082.68) -255.47,-1181.1 255.47,-1181.1 ccw(c255.47,-1082.68) 353.9,-1082.68 353.9,-938.09 cw(c452.32,-938.09) 484.92,-845.22 ; -484.92,845.22 ccw(c-452.32,938.09) -353.9,938.09 -353.9,1082.68 cw(c-255.47,1082.68) -255.47,1181.1 255.47,1181.1 cw(c255.47,1082.68) 353.9,1082.68 353.9,938.09 ccw(c452.32,938.09) 484.92,845.22 ; 484.95,-845.14 cw(c0,-2066.93) 1220.61,-1579.02 ccw(c1476.38,-1476.38) 1578.53,-1220.42 ; 484.95,845.14 ccw(c0,2066.93) 1220.61,1579.02 cw(c1476.38,1476.38) 1578.53,1220.42 ; 790.67,-314.83 ccw(c2066.93,0) 1578.93,-1220.58 ; 790.67,314.83 cw(c2066.93,0) 1578.93,1220.58 ; 790.94,-314.74 cw(c884.53,-284.26) 786.1,-284.26 786.1,284.26 cw(c884.53,284.26) 790.94,314.74
Drill Drawing:
  text ".Legend" at 2247.2,-84.18 h60